# Altium PCB Power Converter 12V as TO-3 replacement.PcbDoc
Units mm, origin at the board's own origin, x right, y up, seen from the top; angles counter-clockwise.
Board outline 25.92 x 38.93 mm, 2 copper layers (Top Layer, Bottom Layer), stack 0.969 mm thick; 20 components, 10 nets, 43 pads, 22 vias.
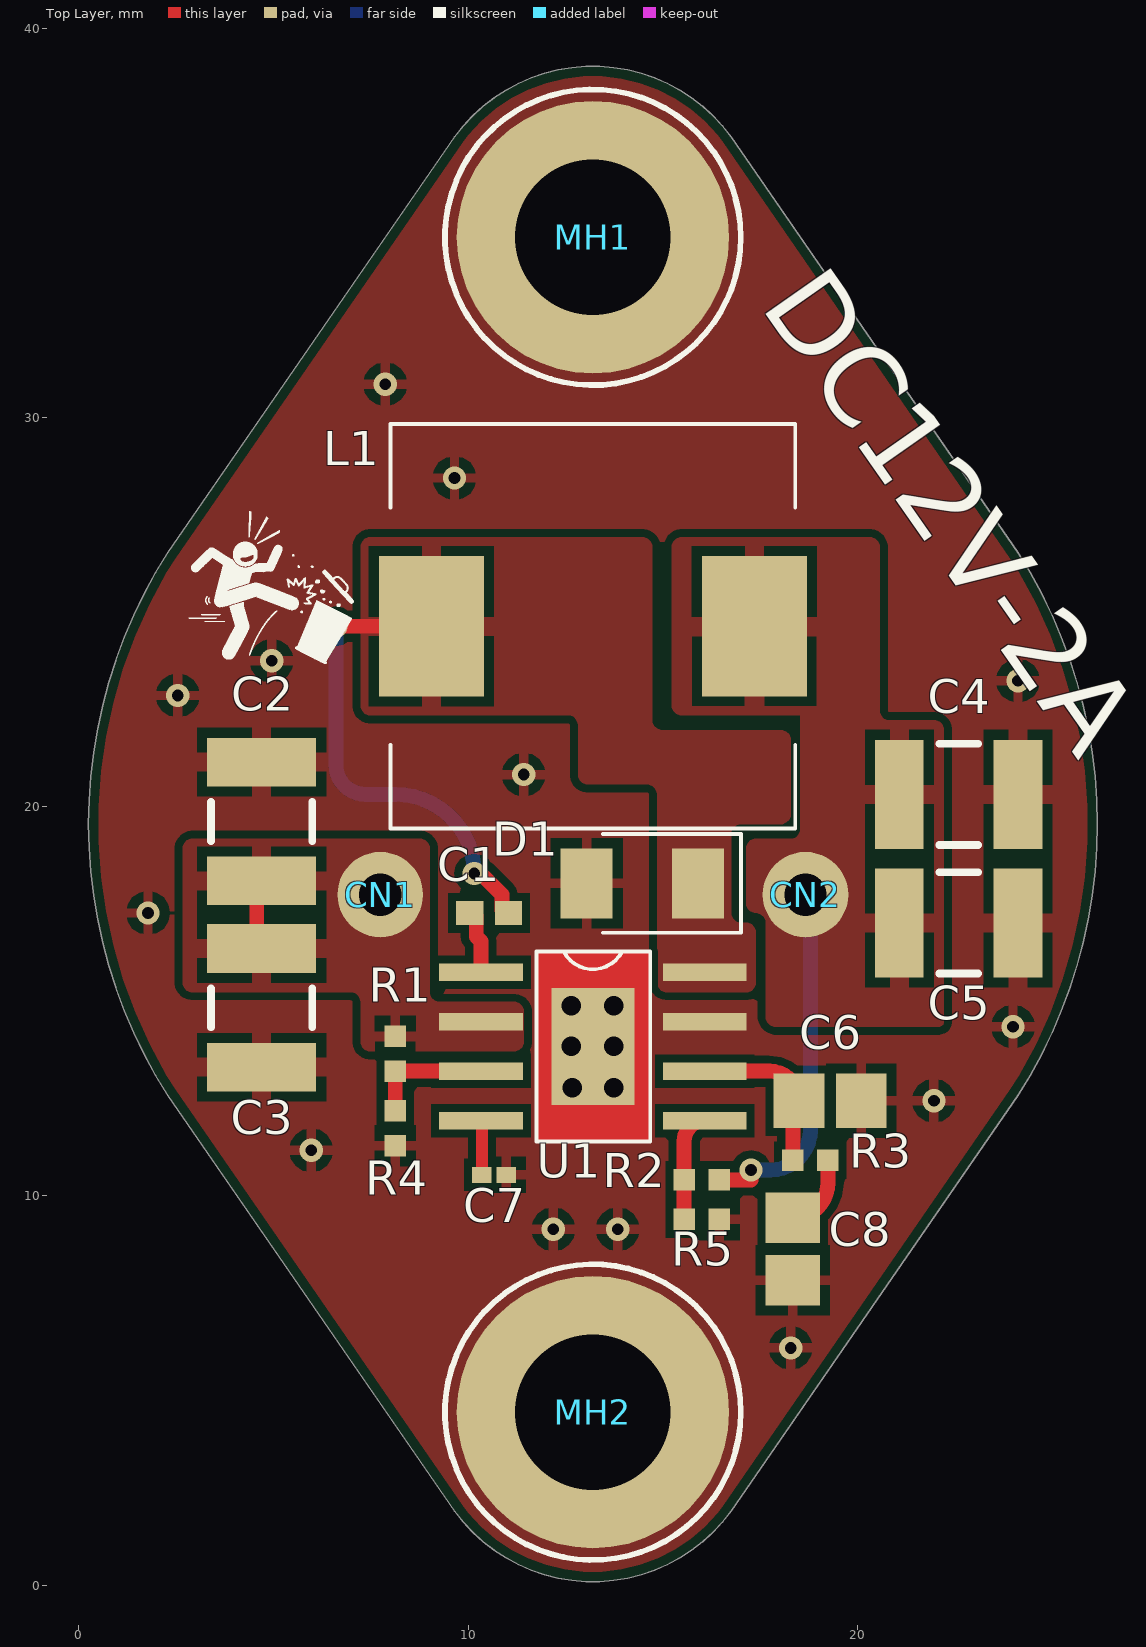
[diagram p0: Top Layer view]
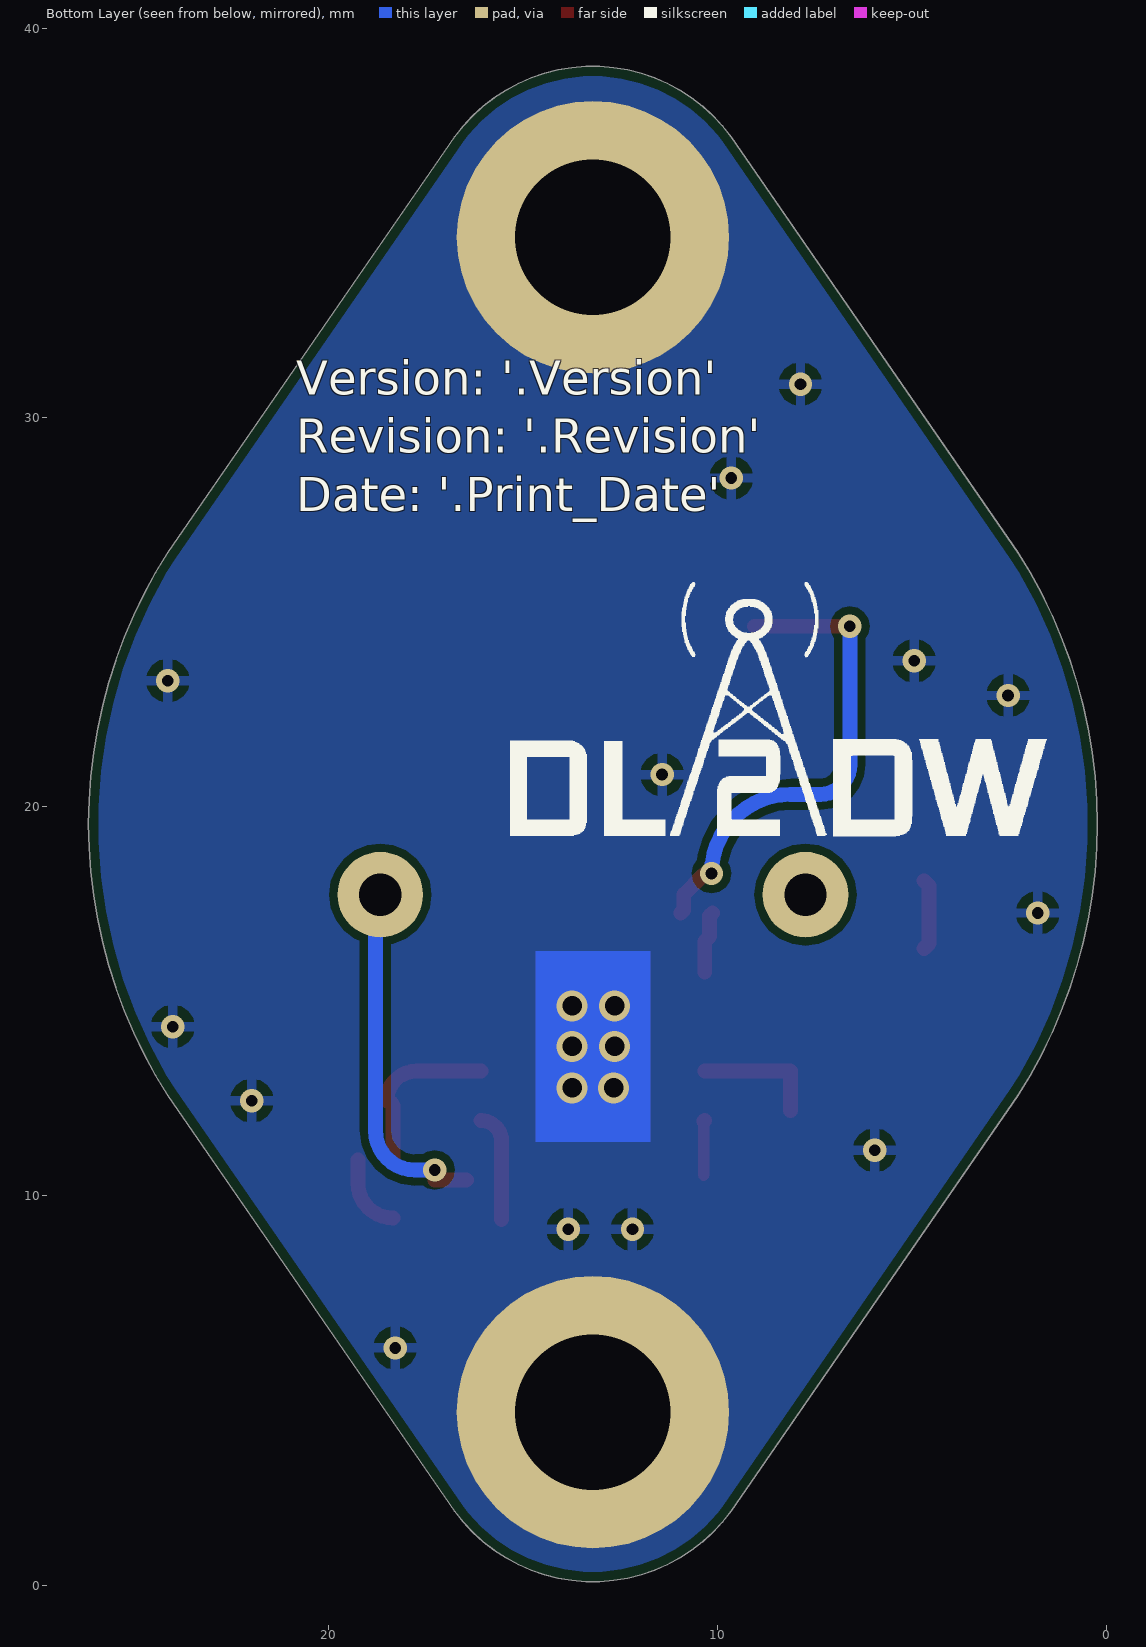
[diagram p1: Bottom Layer view, seen from below]
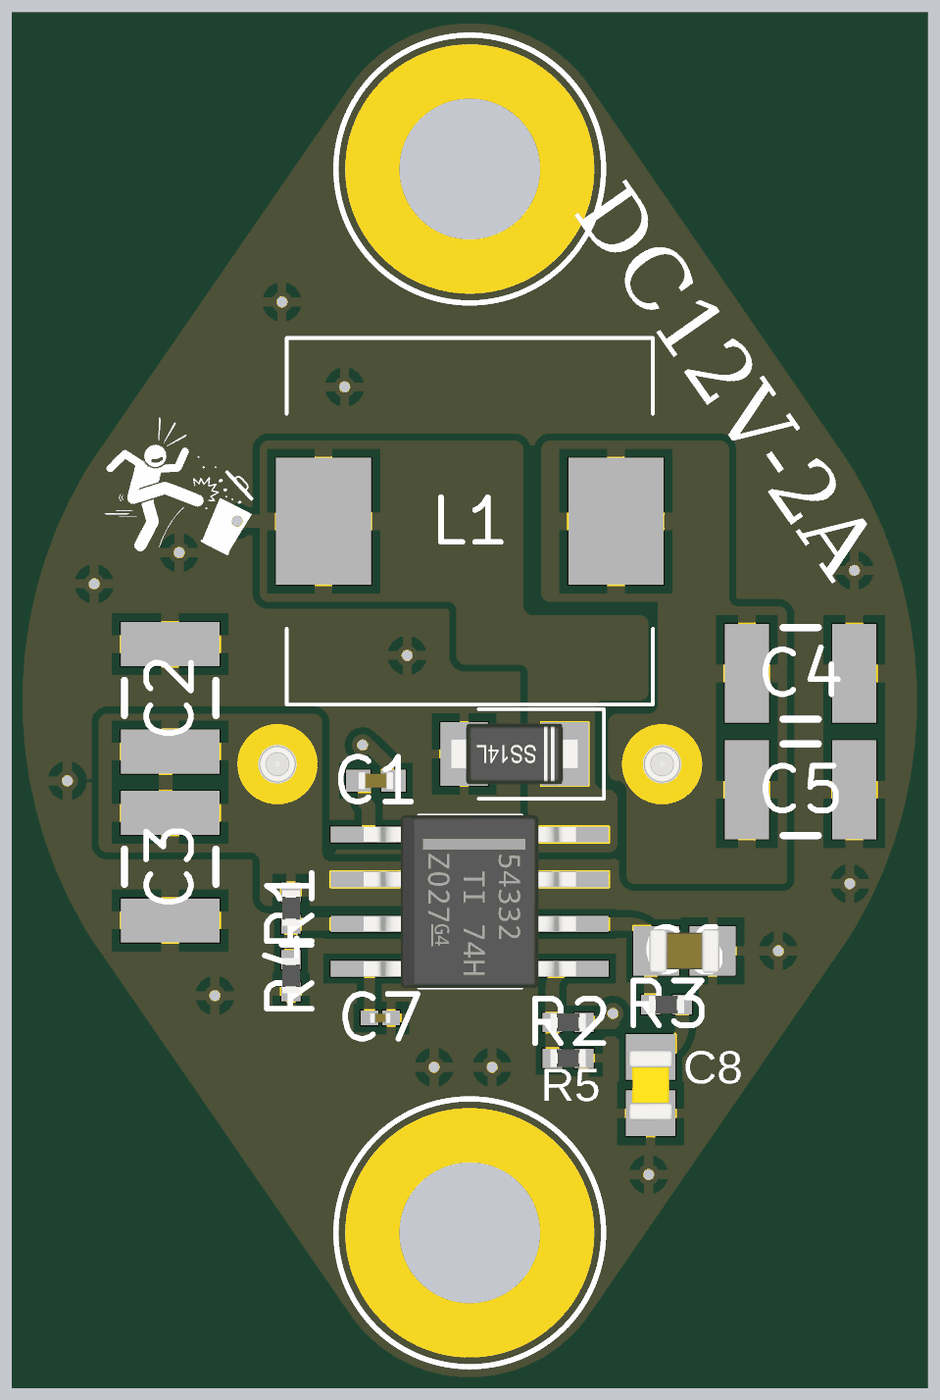
[diagram p2: 3D render of the assembled board from above, using the file's embedded part models]

## Layer stack, top to bottom
Top Solder: solder mask 0.0254, SM-001, Dk 4
Top Layer: signal copper 0.035
Dielectric 1: core 0.8986, Core-043, Dk 4.3
Bottom Layer: signal copper 0.035
Bottom Solder: solder mask 0.0254, SM-001, Dk 4

## Board outline
9.652,1.905 2.29,12.576 cw(c13.208,19.558) 2.29,26.54 9.652,37.211 cw(c13.208,34.633) 16.764,37.211 24.126,26.54 cw(c13.208,19.558) 24.126,12.576 16.764,1.905 cw(c13.208,4.483)

## Design rules (kind name [scope] priority, off if disabled: settings)
BoardOutlineClearance [All] p1: gap=0.254 ignorepadtopadclearanceinfootprint=FALSE
Clearance [All] p1: gap=0.2 ignorepadtopadclearanceinfootprint=TRUE
ComponentClearance ComponentClearance_Sheet [HasFootprint('PCB Title Block DIN A4')] p1: gap=0 collisioncheckmode=3 verticalgap=0 showdistances=FALSE
ComponentClearance [All] p2: gap=0.254 collisioncheckmode=3 verticalgap=0.254 showdistances=FALSE
HoleSize [All] p1: absolutevalues=TRUE maxlimit=10 minlimit=0.025 maxpercent=80.000 minpercent=20.000
MinimumSolderMaskSliver [All] p1: minsoldermaskwidth=0.103
PolygonConnect [All] p1: connectstyle=Relief reliefconductorwidth=0.254 reliefentries=4 polygonreliefangle="90 Angle" airgapwidth=0.254
RoutingVias RoutingVias_Power [(InNet('VCC') OR InNet('GND') OR InNet('+5V'))] p1: holewidth=0.8 width=1.5 viastyle="Through Hole" minholewidth=0.5 minwidth=1 maxholewidth=0.8 maxwidth=1.5
RoutingVias [All] p2: holewidth=0.4 width=0.7 viastyle="Through Hole" minholewidth=0.3 minwidth=0.6 maxholewidth=0.5 maxwidth=0.8
SilkToSilkClearance [All] p1: silktosilkclearance=0
SilkToSolderMaskClearance [IsPad] p1: minsilkscreentomaskgap=0.2 clearancetoexposedcopper=TRUE
SolderMaskExpansion [All] p1: expansion=0.038 istentingtop=FALSE
UnRoutedNet [All] p1: checkbadconnections=TRUE
Width Width_Power [(InNet('VCC') OR InNet('GND') OR InNet('+5V'))] p1: maxlimit=1.5 minlimit=1 preferedwidth=1.5
Width [All] p2: maxlimit=0.6 minlimit=0.3 preferedwidth=0.4
24 further rules are at their usual default settings.

## Components (designator, comment, footprint, x,y, rotation, side; value= is the part's Value field where it differs from the comment)
C1 "100nF / 10V" "CAP CER SMD 0402 100nF 10V Murata GRM155R71A104KA01D" 10.541,17.272 r0 top
C2 "10µF / 50V" "CAP SMD 10µF 50V 1210 TDK C3225X7R1H106M250AC" 4.699,19.624 r270 top
C3 "10µF / 50V" "CAP SMD 10µF 50V 1210 TDK C3225X7R1H106M250AC" 4.699,14.834 r90 top
C4 "10µF / 35V" "CAP SMD 10µF 50V 1210 TDK C3216X6S1V106K160AC" 22.606,20.32 r180 top
C5 "10µF / 35V" "CAP SMD 10µF 50V 1210 TDK C3216X6S1V106K160AC" 22.606,17.018 r180 top
C6 "10pF / 50V" "CAP CER SMD 0805 10pF 50V Samsung CL21C100JBANNNC" 19.304,12.446 r180 top
C7 "8,2nF / 10V" "CAP CER SMD 0201 8,2nF 10V Murata GRM033R71A822KA01D" 10.668,10.541 r180 top
C8 "2nF / 25V" "CAP CER SMD 0805 2nF 25V Kemet C0805C202J3GACTU" 18.346,8.636 r270 top
CN1 "Input 16V" "Printed Circuit Pin 1.02mm 3125-2-00-80-00-00-08-0" 7.745,17.743 r90 top locked
CN2 "+12V" "Printed Circuit Pin 1.02mm 3125-2-00-80-00-00-08-0" 18.671,17.743 r90 top locked
D1 "SS14FL-TP" SS14FL 14.478,18.034 r180 top
L1 "6.8µH" "Shielded Drum Core 6.8µH TDK B82464G4682M" 13.208,24.638 r0 top
MH1 "Mounting Hole 4.0mm with Pad" "Mounting Hole 4mm with Pad" 13.208,34.633 r90 top locked
MH2 "Mounting Hole 4.0mm with Pad" "Mounting Hole 4mm with Pad" 13.208,4.445 r90 top locked
R1 "169k" "RES SMD 0402 169k Vishay CRCW0402169KFKED" 8.128,13.658 r90 top
R2 "10k2" "RES SMD 0402 10k2 Vishay CRCW040210K2FKED" 16.002,10.414 r0 top
R3 "60k4" "RES SMD 0402 60k4 Vishay CRCW040260K4FKED" 18.796,10.922 r180 top
R4 "17k8" "RES SMD 0402 17k8 Vishay CRCW040217K8FKED" 8.128,11.742 r90 top
R5 "732R" "RES SMD 0402 732R Vishay CRCW0402732RFKED" 16.002,9.398 r180 top
U1 "TPS54332DDAR" "DC-DC Converter (Buck) TPS54332DDAR SO-Power Pad" 13.208,13.843 r270 top

## Footprints (in the part's own frame and the unit in brackets; to place one, negate y for a bottom-side part, rotate by r counter-clockwise, add the part's x,y. Pads: shape width x height; smd on the part's side, far side on the other; paste and mask are expansions set on the pad)
"CAP CER SMD 0201 8,2nF 10V Murata GRM033R71A822KA01D" [mm] "Chip Capacitor, 2-Leads, Body 0,60x0,30mm, IPC Medium Density"
  rect 0.5x0.42 smd: 1(-0.31,0) 2(0.31,0)
  body extent -0.3,-0.15 0.3,0.15, height 0.3
"CAP CER SMD 0402 100nF 10V Murata GRM155R71A104KA01D" [mm] "Chip Capacitor, 2-Leads, Body 1,00x0,50mm, IPC Medium Density"
  rect 0.7x0.62 smd: 1(-0.5,0) 2(0.5,0)
  body extent -0.5,-0.25 0.5,0.25, height 0.5
"CAP CER SMD 0805 2nF 25V Kemet C0805C202J3GACTU" [mm] "Chip Capacitor, 2-Leads, Body 2,00x1,25mm, IPC Medium Density"
  rect 1.3x1.4 smd: 1(-0.8,0) 2(0.8,0)
  body extent -1,-0.62 1,0.62, height 0.78
"CAP CER SMD 0805 10pF 50V Samsung CL21C100JBANNNC" [mm] "Chip Capacitor, 2-Leads, Body 2,00x1,25mm, IPC Medium Density"
  rect 1.3x1.4 smd: 1(-0.8,0) 2(0.8,0)
  body extent -1,-0.62 1,0.62, height 1.25
"CAP SMD 10µF 50V 1210 TDK C3216X6S1V106K160AC" [mm] "Chip Capacitor, 2-Leads, Body 3,20x2,50mm, IPC Medium Density"
  rect 1.25x2.8 smd: 1(-1.525,0) 2(1.525,0)
  silkscreen extent -0.5,-1.3 0.5,1.3, body extent -1.6,-1.25 1.6,1.25, height 2.5
"CAP SMD 10µF 50V 1210 TDK C3225X7R1H106M250AC" [mm] "Chip Capacitor, 2-Leads, Body 3,20x2,50mm, IPC Medium Density"
  rect 1.25x2.8 smd: 1(-1.525,0) 2(1.525,0)
  silkscreen extent -0.5,-1.3 0.5,1.3, body extent -1.6,-1.25 1.6,1.25, height 2.5
"DC-DC Converter (Buck) TPS54332DDAR SO-Power Pad" [mm]
  rect 0.45x2.15 smd: 1(-1.905,-2.875) 2(-0.635,-2.875) 3(0.635,-2.875) 4(1.905,-2.875) 5(1.905,2.875) 6(0.635,2.875) 7(-0.635,2.875) 8(-1.905,2.875)
  rect 3x2.13 smd: 9(0,0)
  Top Layer region: -2.445,1.47 2.445,1.47 2.445,-1.47 -2.445,-1.47
  Bottom Layer region: -2.445,1.47 2.445,1.47 2.445,-1.47 -2.445,-1.47
  silkscreen extent -2.44,-1.45 2.44,1.47, body extent -2.45,-3.02 2.45,3.02, height 1.7
"Mounting Hole 4mm with Pad" [mm]
  round 7 hole 4: 1(0,0)
  silkscreen extent -3.8,-3.8 3.8,3.8
"Printed Circuit Pin 1.02mm 3125-2-00-80-00-00-08-0" [mm]
  round 2.2 hole 1.09: 1(0,0)
  body extent -0.9,-0.9 0.9,0.9, height 0.48
"RES SMD 0402 10k2 Vishay CRCW040210K2FKED" [mm] "Chip Resistor, 2-Leads, Body 1,00x0,50mm, IPC Medium Density"
  rect 0.55x0.55 smd: 1(-0.45,0) 2(0.45,0)
  body extent -0.5,-0.25 0.5,0.25, height 0.35
"RES SMD 0402 17k8 Vishay CRCW040217K8FKED" [mm] "Chip Resistor, 2-Leads, Body 1,00x0,50mm, IPC Medium Density"
  rect 0.55x0.55 smd: 1(-0.45,0) 2(0.45,0)
  body extent -0.5,-0.25 0.5,0.25, height 0.35
"RES SMD 0402 60k4 Vishay CRCW040260K4FKED" [mm] "Chip Resistor, 2-Leads, Body 1,00x0,50mm, IPC Medium Density"
  rect 0.55x0.55 smd: 1(-0.45,0) 2(0.45,0)
  body extent -0.5,-0.25 0.5,0.25, height 0.35
"RES SMD 0402 169k Vishay CRCW0402169KFKED" [mm] "Chip Resistor, 2-Leads, Body 1,00x0,50mm, IPC Medium Density"
  rect 0.55x0.55 smd: 1(-0.45,0) 2(0.45,0)
  body extent -0.5,-0.25 0.5,0.25, height 0.35
"RES SMD 0402 732R Vishay CRCW0402732RFKED" [mm] "Chip Resistor, 2-Leads, Body 1,00x0,50mm, IPC Medium Density"
  rect 0.55x0.55 smd: 1(-0.45,0) 2(0.45,0)
  body extent -0.5,-0.25 0.5,0.25, height 0.35
"Shielded Drum Core 6.8µH TDK B82464G4682M" [mm] "6,8µH Geschirmt Drahtgewickelt Induktor 4,3A 20mOhm Max Nicht standardmäßig"
  rect 2.7x3.6 smd: 1(-4.15,0) 2(4.15,0)
  silkscreen extent -5.2,-5.2 5.2,5.2, body extent -5.2,-5.2 5.2,5.2, height 4.77
SS14FL [mm] "Dioden Schottky 40V 1A Oberflächenmontage DO-221AC (SMA-FL)"
  rect 1.34x1.8 smd: 1(-1.43,0) 2(1.43,0)
  silkscreen extent -2.54,-1.27 1.02,1.27, body extent -1.8,-0.86 1.8,0.86, height 1.04

## Part data
C1: library part CMP-Capacitors-Ceramic_Capacitors-00034-2, "CAP CER 0.1UF 10V X7R 0402", Capacitance=100nF, Case Code (Imperial)=0402, Case Code (Metric)=1005, Dielectric=X7R, Max Operating Temperature=125°C, Min Operating Temperature=-55°C, Package Quantity=1, Tolerance=10%, Voltage=10V, Case/Package=0402, Depth=0.5mm, Dissipation Factor=0.035%, Height=0.5mm, Lead Free="Lead Free", Length=1mm, Mount="Surface Mount", Number of Pins=2, Packaging="Tape and Reel", Radiation Hardening=No, REACH SVHC="No SVHC", Termination=SMD/SMT, Thickness=0.022inch, Voltage Rating=10V, Voltage Rating (DC)=10V, Width=0.02inch
C2 C3: library part CMP-Capacitors-Ceramic_Capacitors-00030-1, "TDK - C3225X7R1H106M250AC - C3225X7R1H106MT000E", Capacitance=10uF, Case Code (Imperial)=1210, Case Code (Metric)=3225, Dielectric=X7R, Dielectric Material=Ceramic, Max Operating Temperature=125°C, Min Operating Temperature=-55°C, Package Quantity=1000, Tolerance=20%, Voltage Rating=50V, Case/Package=1210, Height=2.5mm, Lead Free="Lead Free", Length=0.126inch, Mount="Surface Mount", Packaging="Tape and Reel", REACH SVHC="No SVHC", Termination=SMD/SMT, Thickness=0.11inch, Voltage Rating (DC)=50V, Weight=0.000564oz, Width=0.098inch
C4 C5: library part CMP-Capacitors-Ceramic_Capacitors-00035-1, "Cap Ceramic 10uF 35V X6S 10% SMD 1206 105°C Punched Paper T/R", Capacitance=10uF, Case Code (Imperial)=1206, Case Code (Metric)=3216, Dielectric=X6S, Dielectric Material=Ceramic, Max Operating Temperature=105°C, Min Operating Temperature=-55°C, Package Quantity=2000, Tolerance=10%, Voltage Rating=35V, Case/Package=1206, Height=1.6mm, Lead Free="Lead Free", Length=0.126inch, Mount="Surface Mount", Packaging="Tape and Reel", Termination=SMD/SMT, Thickness=0.071inch, Voltage Rating (DC)=35V, Weight=0.000571oz, Width=0.063inch
C6: library part CMP-Capacitors-Ceramic_Capacitors-00031-1, "Cap Ceramic 10pF 50VDC C0G 5% SMD 0805 Paper T/R", Capacitance=10pF, Case Code (Imperial)=0805, Case Code (Metric)=2012, Dielectric=C0G, Max Operating Temperature=125°C, Min Operating Temperature=-55°C, Package Quantity=1, Tolerance=5%, Voltage Rating=50V, Case/Package=0805, Contact Plating=Tin, Depth=1.25mm, Height=0.65mm, Length=2mm, Mount="Surface Mount", Packaging="Tape and Reel", Radiation Hardening=No, Thickness=0.03inch, Width=0.049inch
C7: library part CMP-Capacitors-Ceramic_Capacitors-00033-1, "Multilayer Ceramic Capacitors MLCC - SMD/SMT 0.0082uF 10volts 10%", Capacitance=8.2nF, Case Code (Imperial)=0201, Case Code (Metric)=0603, Dielectric=X7R, Max Operating Temperature=125°C, Min Operating Temperature=-55°C, Package Quantity=15000, Tolerance=10%, Voltage Rating=10V, Case/Package=0201, Depth=0.3mm, Height=0.3mm, Length=0.6mm, Mount="Surface Mount", Packaging="Tape and Reel", Radiation Hardening=No, Termination=SMD/SMT, Thickness=0.013inch, Voltage Rating (DC)=10V, Width=0.012inch
C8: library part CMP-Capacitors-Ceramic_Capacitors-00032-1, "Multilayer Ceramic Capacitors MLCC - SMD/SMT 25volts 2000pF C0G 5%", Capacitance=2nF, Case Code (Imperial)=0805, Case Code (Metric)=2012, Dielectric=C0G, Dielectric Material=Ceramic, Max Operating Temperature=125°C, Min Operating Temperature=-55°C, Package Quantity=4000, Tolerance=5%, Voltage Rating=25V, Case/Package=0805, Depth=1.25mm, Dissipation Factor=0.1%, Height=0.78mm, Lead Free="Lead Free", Lead Pitch=0.75mm, Length=2mm, Mount="Surface Mount", Packaging="Tape and Reel", REACH SVHC="No SVHC", Termination=SMD/SMT, Thickness=0.035inch, Voltage Rating (DC)=25V, Width=1.2mm
CN1 CN2: library part CMP-Mechanicals-00020-1, "CONN PC PIN CIRC 0.040DIA TIN", Package Quantity=500, Board Thickness=0.062inch, Contact Material=Brass, Contact Plating=Tin, Flange Diameter=0.071inch, Gender=Male, Hole Diameter=1.09mm, Insulation=Non-Insulated, Length=0.402inch, Material=Brass, Mount="Through Hole", Mounting Hole Diameter=0.043inch, Outside Diameter=1.8mm, Packaging=Bulk, Plating=Tin, Termination="PC Pin"
D1: library part CMP-Diodes-00014-2, "DIODE SCHOTTKY 40V 1A DO221AC", Average Rectified Current=1A, Max Reverse Voltage (DC)=40V, Mount="Surface Mount", Packaging="Tape and Reel"
L1: library part CMP-Inductors-00013-1, "Inductor Power Shielded Wirewound 6.8uH 20% 100KHz Ferrite 4.3A 0.02Ohm DCR Automotive T/R", Case/Package=Nonstandard, Current Rating=2A, DC Current=4.3A, DC Resistance (DCR)=20mR, Inductance=6.8uH, Inductance Tolerance=20%, Max Operating Temperature=150°C, Min Operating Temperature=-55°C, Package Quantity=750, Ratings=AEC-Q200, Saturation Current=4.6A, Self Resonant Frequency=28MHz, Test Frequency=100kHz, Composition=Wirewound, Core Material=Ferrite, Depth=10.4mm, Height=4.8mm, Height - Seated (Max)=0.189inch, Lead Free="Lead Free", Length=10.4mm, Max DC Current=4.3A, Military Standard=Not, Mount="Surface Mount", Packaging="Tape and Reel", Radiation Hardening=No, REACH SVHC="No SVHC", RMS Current (Irms)=4.3A, Shielding=Shielded, Termination=SMD/SMT, Tolerance=20%, Weight=0.070548oz, Width=10.4mm
MH1 MH2: library part CMP-Mechanicals-00019-2
R1: library part CMP-Resistors-00008-1, "VISHAY - CRCW0402169KFKED - RES, THICK FILM, 169K, 1%, 0.063W, 0402, REEL", Case Code (Imperial)=0402, Case Code (Metric)=1005, Max Operating Temperature=155°C, Max Power Dissipation=63mW, Min Operating Temperature=-55°C, Package Quantity=10, Resistance=169kR, Temperature Coefficient=100ppm/°C, Tolerance=1%, Voltage Rating=50V, Case/Package=0402, Composition="Thick Film", Contact Plating=Tin, Depth=0.5mm, Features="Automotive AEC-Q200", Height=0.35mm, Lead Free="Lead Free", Length=1mm, Military Standard=Not, Mount="Surface Mount", Number of Pins=2, Number of Terminations=2, Packaging="Tape and Reel", Power Rating=63mW, Radiation Hardening=No, REACH SVHC=Unknown, Termination=SMD/SMT, Voltage Rating (DC)=50V, Weight=2.3E-05oz, Width=0.02inch
R2: library part CMP-Resistors-00024-1, "VISHAY         CRCW040210K2FKED.            Surface Mount Chip Resistor, Thick Film, AEC-Q200 CRCW Series, 10.2 kohm, 63 mW,  1%, 50 V", Case Code (Imperial)=0402, Case Code (Metric)=1005, Max Operating Temperature=155°C, Max Power Dissipation=63mW, Min Operating Temperature=-55°C, Package Quantity=10, Resistance=10.2kR, Temperature Coefficient=100ppm/°C, Tolerance=1%, Voltage Rating=50V, Case/Package=0402, Composition="Thick Film", Contact Plating=Tin, Depth=0.5mm, Features="Automotive AEC-Q200", Height=0.35mm, Length=1mm, Military Standard=Not, Mount="Surface Mount", Number of Pins=2, Number of Terminations=2, Packaging="Tape and Reel", Power Rating=63mW, Radiation Hardening=No, REACH SVHC=Unknown, Termination=SMD/SMT, Weight=2.3E-05oz, Width=0.5mm
R3: library part CMP-Resistors-00010-1, "VISHAY - CRCW040260K4FKED - SMD Chip Resistor, 0402 [1005 Metric], 60.4 kohm, CRCW e3 Series, 50 V, Thick Film, 63 mW", Case Code (Imperial)=0402, Case Code (Metric)=1005, Max Operating Temperature=155°C, Max Power Dissipation=63mW, Min Operating Temperature=-55°C, Package Quantity=10000, Resistance=60.4kR, Temperature Coefficient=100ppm/°C, Tolerance=1%, Voltage Rating=50V, Case/Package=0402, Composition="Thick Film", Contact Plating=Tin, Depth=0.5mm, Features="Automotive AEC-Q200", Height=0.35mm, Lead Free="Lead Free", Length=1mm, Military Standard=Not, Number of Terminations=2, Packaging="Tape and Reel", Power Rating=63mW, Radiation Hardening=No, REACH SVHC=Unknown, Termination=SMD/SMT, Voltage Rating (DC)=50V, Weight=2.3E-05oz, Width=0.02inch
R4: library part CMP-Resistors-00009-1, "VISHAY - CRCW040217K8FKED - RES, THICK FILM, 17K8, 1%, 0.063W, 0402", Case Code (Imperial)=0402, Case Code (Metric)=1005, Max Operating Temperature=155°C, Max Power Dissipation=63mW, Min Operating Temperature=-55°C, Package Quantity=10, Resistance=17.8kR, Temperature Coefficient=100ppm/°C, Tolerance=1%, Voltage Rating=50V, Case/Package=0402, Composition="Thick Film", Contact Plating=Tin, Depth=0.5mm, Features="Automotive AEC-Q200", Height=0.016inch, Lead Free="Lead Free", Length=1mm, Military Standard=Not, Number of Pins=2, Number of Terminations=2, Packaging="Tape and Reel", Power Rating=63mW, Radiation Hardening=No, REACH SVHC=Unknown, Termination=SMD/SMT, Voltage Rating (DC)=50V, Weight=2.3E-05oz, Width=0.02inch
R5: library part CMP-Resistors-00017-1, "RES, THICK FILM, 732R, 1%, 0.063W, 0402, REEL; Product Range:AEC-Q200 CRCW Series; Resistance:732ohm; Power Rating:63mW; Resistance Tolerance: 1%; Voltage Rating:50V; Resistor Case Style:0402 [1005 Metric]; Packaging:Tape & Reel ;RoHS Compliant: Yes", Case Code (Imperial)=0402, Case Code (Metric)=1005, Max Operating Temperature=155°C, Max Power Dissipation=63mW, Min Operating Temperature=-55°C, Package Quantity=10, Temperature Coefficient=100ppm/°C, Tolerance=1%, Voltage Rating=50V, Case/Package=0402, Composition="Thick Film", Contact Plating=Tin, Depth=0.5mm, Features="Automotive AEC-Q200", Height=0.35mm, Lead Free="Lead Free", Length=1mm, Military Standard=Not, Number of Pins=2, Number of Terminations=2, Packaging="Tape and Reel", Power Rating=63mW, Radiation Hardening=No, REACH SVHC=Unknown, Resistance=732R, Termination=SMD/SMT, Voltage Rating (DC)=50V, Weight=2.3E-05oz, Width=0.5mm
U1: library part CMP-ICs-Power_Supply-00013-5, "TEXAS INSTRUMENTS - TPS54332DDAR - DC/DC CONV, BUCK, 1MHZ, SOIC-8", Max Input Voltage=28V, Max Operating Temperature=150°C, Max Output Current=3.5A, Max Output Voltage=26.04V, Min Input Voltage=3.5V, Min Operating Temperature=-40°C, Min Output Voltage=800mV, Output Voltage=25V, Package Quantity=2500, Quiescent Current=82uA, Switching Frequency=1MHz, Contact Plating=Gold, Height=1.55mm, Lead Free="Contains Lead", Length=5mm, Min Supply Voltage=3.5V, Mount="Surface Mount", Number of Outputs=1, Number of Pins=8, Operating Supply Voltage=28V, Output Configuration=Positive, Output Current=3.5A, Output Type=Adjustable, Packaging="Tape and Reel", Radiation Hardening=No, REACH SVHC="No SVHC", Synchronous Rectifier=No, Weight=0.00249oz, Width=4mm

## Via types
v1: diameter 0.6, hole 0.3, Top Layer to Bottom Layer, tented both sides, 16 vias
v2: diameter 0.8, hole 0.5, Top Layer to Bottom Layer, tented both sides, 4 vias
v3: diameter 0.8, hole 0.5, Top Layer to Bottom Layer, tented bottom, 2 vias

## Nets (pads, with @x,y where several pads share a name; then routed paths per layer and width w, separated by ;. In a path a pad name is that pad's centre, name@x,y a point inside that pad or via, vN(x,y) a via of type N, cw(c..) or ccw(c..) an arc to the next point about the centre after c; other vN are vias at no path point)
12V-GND: C2.1 C3.1 C4.1 C5.1 C6.1 C7.1 C8.2 D1.2 MH1.1 MH2.1 R4.1 R5.1 U1.7 U1.9
  other v1: 18.288,6.096 12.192,9.144 13.843,9.144 5.969,11.176 21.971,12.446 24.003,14.351 1.778,17.272 11.43,20.828 2.54,22.86 24.13,23.241 4.953,23.749 9.652,28.448 7.874,30.861
  other v2: 12.675,12.776 13.741,12.776 12.649,14.884 13.741,14.884
  other v3: 12.649,13.843 13.741,13.843
+12V: C4.2 C5.2 CN2.1 L1.2 R2.2 | length 9.3
  Top Layer w0.381: R2.2 17.272,10.414 v1(17.272,10.668)
  Bottom Layer w0.381: v1(17.272,10.668) 17.78,10.668 ccw(c17.78,11.684) 18.796,11.684 18.796,17.618 ccw(c18.671,17.618) CN2.1
Boot: C1.1 U1.1 | length 1.6
  Top Layer w0.381: C1.1@10.131,17.272 10.211,17.193 10.211,16.667 10.333,16.545 U1.1
Comp: C6.2 R3.2 U1.6 | length 4.5
  Top Layer w0.381: U1.6 17.742,13.208 cw(c17.742,12.446) C6.2 ccw(c18.504,12.288) 18.346,12.288 R3.2
EN: R1.1 R4.2 U1.3 | length 3.2
  Top Layer w0.381: R4.2 R1.1 U1.3
NetC8_1: C8.1 R3.1 | length 2
  Top Layer w0.381: C8.1 ccw(c18.346,10.336) 19.246,10.336 R3.1
PH: C1.2 D1.1 L1.1 U1.8 | length 12.6
  Top Layer w0.381: v1(6.604,24.638) L1.1 ; v1(10.16,18.288) 10.202,18.246 10.369,18.246 10.872,17.744 10.872,17.351 C1.2@10.951,17.272
  Bottom Layer w0.381: v1(6.604,24.638) 6.604,21.082 ccw(c7.366,21.082) 7.366,20.32 8.128,20.32 cw(c8.128,18.288) v1(10.16,18.288)
SS: C7.2 U1.4 | length 1.4
  Top Layer w0.3: C7.2 U1.4@10.358,11.913
  Top Layer w0.381: U1.4 cw(c10.333,11.913) U1.4@10.358,11.913
Vin: C2.2 C3.2 CN1.1 R1.2 U1.2 | length 1.8
  Top Layer w0.381: C3.2 4.572,16.486 4.572,17.972 C2.2
VSense: R2.1 R5.2 U1.5 | length 2.8
  Top Layer w0.381: R5.2 R2.1 15.552,11.407 cw(c16.083,11.407) U1.5

## Polygon pours and split planes (outlines as drawn)
12V-GND on Top Layer "12V-GND_L01_P012" (solid, remove dead copper, pour order 12): 9.652,1.905 2.29,12.576 cw(c13.208,19.558) 2.29,26.54 9.652,37.211 cw(c13.208,34.633) 16.764,37.211 24.126,26.54 cw(c13.208,19.558) 24.126,12.576 16.764,1.905 cw(c13.208,4.483)
PH on Top Layer "Top Layer - +12V" (solid, pour order 11): 16.764,18.415 16.764,19.304 cw(c17.018,19.304) 17.018,19.558 18.034,19.558 ccw(c18.034,19.812) 18.288,19.812 18.288,21.717 ccw(c18.034,21.717) 18.034,21.971 14.986,21.971 cw(c14.986,22.225) 14.732,22.225 ccw(c14.605,22.225) 14.605,22.352 14.351,22.352 ccw(c14.351,22.098) 14.097,22.098 14.097,20.955 ccw(c14.224,20.955) 14.224,20.828 14.859,20.828 cw(c14.859,20.574) 15.113,20.574 15.113,18.415
+12V on Top Layer "Top Layer - +12V" (solid, pour order 10): 17.653,16.637 17.653,17.018 ccw(c17.399,17.018) 17.399,17.272 cw(c17.399,17.526) 17.145,17.526 17.145,18.923 cw(c17.399,18.923) 17.399,19.177 18.288,19.177 ccw(c18.288,19.431) 18.542,19.431 cw(c18.796,19.431) 18.796,19.685 19.05,19.685 cw(c19.05,18.669) 20.066,18.669 20.066,17.526 cw(c19.177,17.526) 19.177,16.637
+12V on Top Layer "Top Layer - +12V" (solid, pour order 9): 15.24,22.987 15.24,22.606 ccw(c15.494,22.606) 15.494,22.352 19.177,22.352 ccw(c19.177,22.606) 19.431,22.606 19.431,22.987
+12V on Top Layer "Top Layer - +12V" (solid, pour order 8): 20.32,26.924 cw(c20.32,26.67) 20.574,26.67 20.574,22.479 ccw(c20.828,22.479) 20.828,22.225 21.971,22.225 cw(c21.971,21.971) 22.225,21.971 22.225,14.478 cw(c22.098,14.478) 22.098,14.351 17.907,14.351 cw(c17.907,14.605) 17.653,14.605 17.653,18.415 cw(c18.288,18.415) 18.288,19.05 ccw(c18.288,19.304) 18.542,19.304 18.542,22.479 ccw(c18.288,22.479) 18.288,22.733 15.494,22.733 cw(c15.494,22.987) 15.24,22.987 15.24,26.67 cw(c15.494,26.67) 15.494,26.924
PH on Top Layer "Top Layer - +12V" (solid, pour order 4): 14.859,15.494 ccw(c15.113,15.494) 15.113,15.24 17.145,15.24 ccw(c17.145,15.494) 17.399,15.494 17.399,16.764 ccw(c17.145,16.764) 17.145,17.018 17.018,17.018 cw(c17.018,17.272) 16.764,17.272 16.764,20.828 ccw(c16.51,20.828) 16.51,21.082 14.986,21.082 cw(c14.986,21.336) 14.732,21.336 14.732,26.67 ccw(c14.478,26.67) 14.478,26.924 7.493,26.924 ccw(c7.493,26.67) 7.239,26.67 7.239,22.606 ccw(c7.493,22.606) 7.493,22.352 12.573,22.352 cw(c12.573,22.098) 12.827,22.098 12.827,20.828 ccw(c13.081,20.828) 13.081,20.574 14.605,20.574 cw(c14.605,20.32) 14.859,20.32
no net on Top Layer "Top Layer - +12V" (solid, pour order 2): 7.366,24.638
Vin on Top Layer "Top Layer - +12V" (solid, pour order 0): 11.43,14.732 ccw(c11.176,14.732) 11.176,14.986 9.271,14.986 cw(c9.271,15.24) 9.017,15.24 9.017,18.923 ccw(c8.763,18.923) 8.763,19.177 2.921,19.177 ccw(c2.921,18.923) 2.667,18.923 2.667,15.494 ccw(c2.921,15.494) 2.921,15.24 6.985,15.24 cw(c6.985,14.986) 7.239,14.986 7.239,13.97 ccw(c7.493,13.97) 7.493,13.716 11.176,13.716 ccw(c11.176,13.97) 11.43,13.97
12V-GND on Bottom Layer "12V-GND_L02_P013" (solid, remove dead copper, pour order 13): 9.652,1.905 2.29,12.576 cw(c13.208,19.558) 2.29,26.54 9.652,37.211 cw(c13.208,34.633) 16.764,37.211 24.126,26.54 cw(c13.208,19.558) 24.126,12.576 16.764,1.905 cw(c13.208,4.483)

## Silkscreen, mask and mechanical layers (free items; w line width, h text height)
Top Overlay:
  drawing of 24 lines, arcs and shapes, not listed
  text "DC12V-2A" at 16.938,32.5 h3.5 r305
Bottom Overlay:
  drawing of 8 lines, arcs and shapes, not listed
  text "Version: '.Version' / Revision: '.Revision' / Date: '.Print_Date'" at 20.828,27.297 h1.5
Board:
  the board outline again, w0.1